# EAGLE board RotaryEncoder1 (EAGLE 9.6.2)
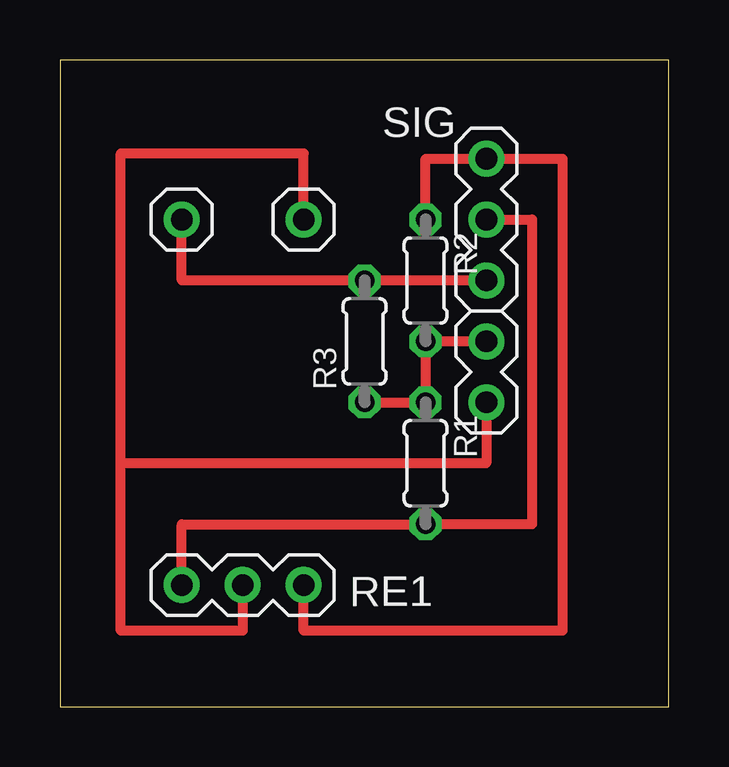
[diagram p0: board, top side]

Size 25.38 x 26.98 mm. Coordinates in mm from the lower left corner, seen from the top.
Outline: 0,0 25.38,0 25.38,26.98 0,26.98 0,0
Copper layers (1*16): Top 0.035mm / dielectric 1.5mm / Bottom 0.035mm
Design rules "default": minimum track width 6mil, minimum drill 0.35mm, track to track 6mil, track to pad 6mil, pad to pad 6mil, via to via 6mil, smd to smd 6mil, copper to edge 40mil, drill to drill 6mil, minimum pad ring 10mil, minimum via ring 8mil, stop-mask expansion 4mil, vias tented up to drill 0mil, thermal gap 10mil

## Footprints (pad centres in the part's own frame; a part is rotated, then mirrored left to right if it is on the bottom)
PINHEAD-MA02-1 = drill 0.9 pad 1.5: 1 -1.27,0; 2 1.27,0
0204/5 = drill 0.813 octagon: 1 -2.54,0; 2 2.54,0
PINHEAD-MA03-1 = drill 0.9 pad 1.5: 1 -1.27,0; 2 1.27,0; 3 3.81,0
PINHEAD-MA01-1 = drill 0.9 pad 1.5: 1 1.27,0

## Placement (x,y rotation side)
POW  [PINHEAD-MA02-1]  17.78,13.97 270 top
R1  10K  [0204/5]  15.24,10.16 270 top
R2  10K  [0204/5]  15.24,17.78 270 top
R3  10K  [0204/5]  12.7,15.24 90 top
RE1  [PINHEAD-MA03-1]  8.89,5.08 180 top
RE_G  [PINHEAD-MA01-1]  10.16,21.59 270 top
RE_SW  [PINHEAD-MA01-1]  5.08,21.59 270 top
SIG  [PINHEAD-MA03-1]  17.78,21.59 270 top

## Library data of the parts
POW RE_G RE_SW = ytani1
R1-R3 = rcl; SPICEPREFIX: R
RE1 SIG = ytani1; OC_FARNELL: unknown; OC_NEWARK: unknown

## Nets
+3V3: POW.1 R1.1 R2.2 R3.1
GND: POW.2 RE1.2 RE_G.1
N$1: R3.2 RE_SW.1 SIG.3
N$2: R1.2 RE1.3 SIG.2
N$4: R2.1 RE1.1 SIG.1

## Tracks (layer width: path | path; a pad name or v marks a point on that pad's centre or on a via)
+3V3
  Top 0.406: POW.1 R2.2 R1.1 R3.1
GND
  Top 0.406: RE1.2 7.62,3.17 2.54,3.17 2.54,10.16 | POW.2 17.78,10.16 2.54,10.16 | 2.54,10.16 2.54,23.07 10.16,23.07 RE_G.1
N$1
  Top 0.406: RE_SW.1 5.08,17.78 R3.2 SIG.3
N$2
  Top 0.152: R1.2 15.16,7.54
  Top 0.406: RE1.3 5.08,7.62 R1.2 19.68,7.62 19.68,20.32 SIG.2
N$4
  Top 0.406: R2.1 15.24,22.86 SIG.1 20.95,22.86 20.95,3.17 10.16,3.17 RE1.1